# Altium PCB MCU.PcbDoc
Units mm, origin at the board's own origin, x right, y up, seen from the top; angles counter-clockwise.
Board outline 93.08 x 53.26 mm, 2 copper layers (Top Layer, Bottom Layer); 53 components, 42 nets, 223 pads, 2 vias.
Unrouted connection lines stored in the file: 56.
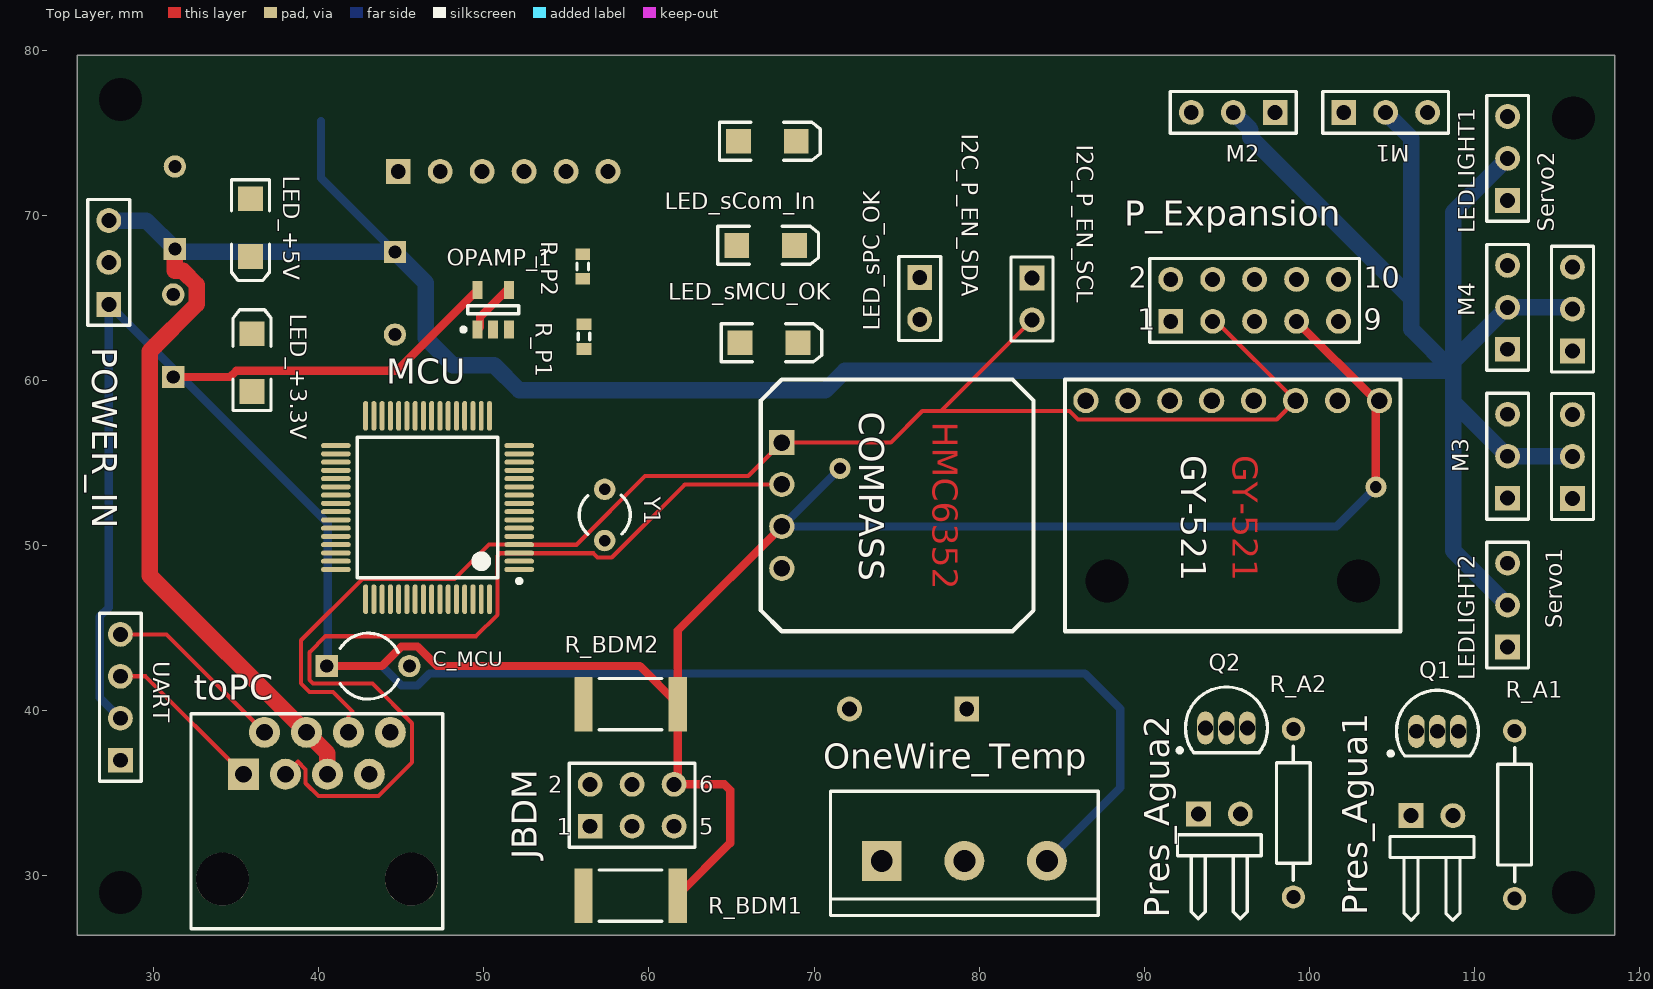
[diagram p0: Top Layer view]
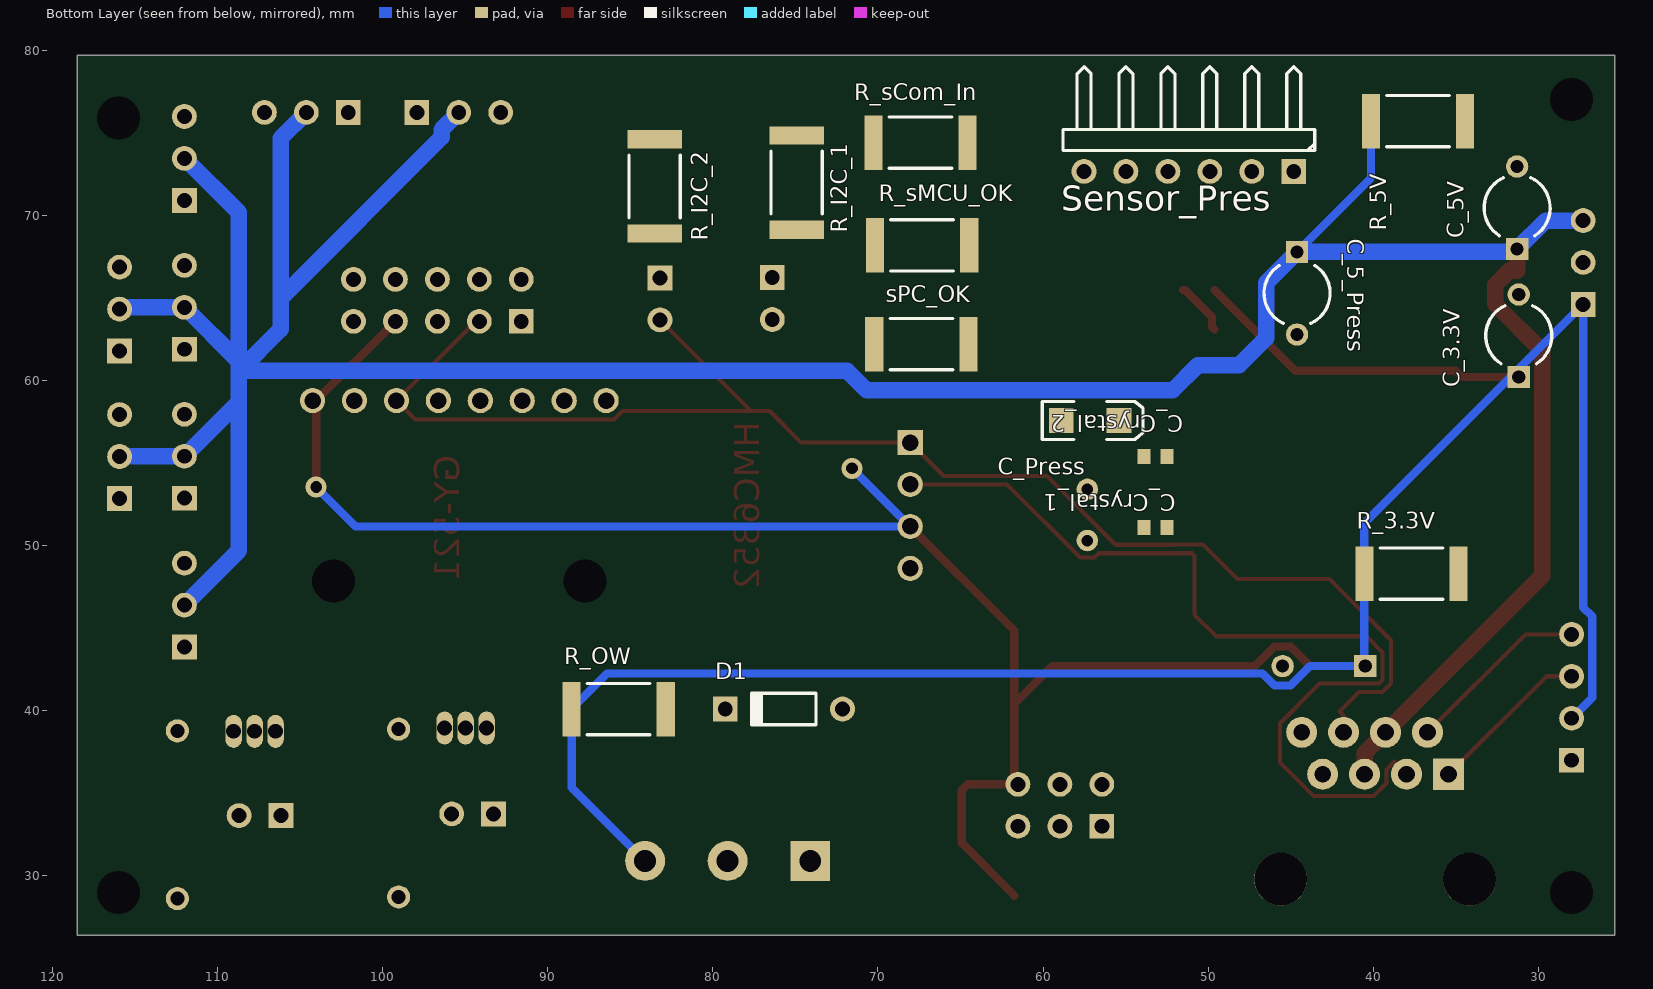
[diagram p1: Bottom Layer view, seen from below]

## Layer stack, top to bottom
Top Solder: solder mask 0.0102, Solder Resist, Dk 3.5
Top Layer: signal copper 0.0356
Dielectric 1: dielectric 0.32, FR-4, Dk 4.8
Bottom Layer: signal copper 0.0356
Bottom Solder: solder mask 0.0102, Solder Resist, Dk 3.5

## Board outline
25.4,79.675 25.4,26.416 118.475,26.416 118.475,79.675

## Design rules (kind name [scope] priority, off if disabled: settings)
Clearance Clearance_1 [InComponent('MCU')] p1: gap=0.2
Clearance [All] p2: gap=0.254
ComponentClearance ComponentClearance_1 [All] p1: gap=0.254 collisioncheckmode=3 verticalgap=0.254 showdistances=FALSE
PolygonConnect [All] p1: connectstyle=Relief reliefconductorwidth=0.254 reliefentries=4 polygonreliefangle="90 Angle" airgapwidth=0.254
RoutingVias [All] p1: holewidth=0.711 width=1.27 viastyle="Through Hole" minholewidth=0.711 minwidth=1.27 maxholewidth=0.711 maxwidth=1.27
SolderMaskExpansion [All] p1: expansion=0.102
Width [All] p1: maxlimit=1 minlimit=0.15 preferedwidth=0.254
29 further rules are at their usual default settings.

## Classes and differential pairs
component class ADC_PRES: C_5_Press C_Press OPAMP_1 R_P1 R_P2 Sensor_Pres
component class "Expansion Board": P_Expansion
component class Fuente: C_3.3V C_5V C_MCU POWER_IN
component class MCU: C_Crystal_1 C_Crystal_2 COMPASS D1 GY-521 I2C_P_EN_SCL I2C_P_EN_SDA JBDM LED_+3.3V LED_+5V LED_sCom_In LED_sMCU_OK LED_sPC_OK MCU OneWire_Temp R_3.3V R_5V R_BDM1 R_BDM2 R_I2C_1 R_I2C_2 R_OW R_sCom_In R_sMCU_OK sPC_OK toPC UART Y1
component class Presencia_Agua: Pres_Agua1 Pres_Agua2 Q1 Q2 R_A1 R_A2
component class PWM_OUTS: LEDLIGHT1 LEDLIGHT2 M1 M2 M3 M4 Servo1 Servo2

## Components (designator, comment, footprint, x,y, rotation, side; value= is the part's Value field where it differs from the comment)
C_3.3V "Cap Pol1" CAPR5-4X5 31.2,62.7 r90 bottom
C_5_Press "Cap Pol1" CAPR5-4X5 44.625,65.275 r270 bottom
C_5V "Cap Pol1" CAPR5-4X5 31.3,70.45 r90 bottom
C_Crystal_1 "Cap Semi" 1608[0603] 53.2,51.1 r0 bottom
C_Crystal_2 "Cap Semi" 1608[0603] 53.2,55.4 r0 bottom
C_MCU "Cap Pol1" CAPR5-4X5 43,42.7 r0 top
C_Press "Cap" 3.2X1.6X1.1 57.15,57.575 r180 bottom
COMPASS "HMC6352" HMC6352_SF 66.525,60.3 r270 top
D1 "Diode 1N4148" DO-35 75.7,40.1 r0 bottom
GY-521 "MPU-6050 Board GY-521" GY-521 82.65,58.775 r270 top
I2C_P_EN_SCL "Jumper_STANDARD" HDR1X2 83.2,66.2 r270 top
I2C_P_EN_SDA "Jumper_STANDARD" HDR1X2 76.4,66.225 r270 top
JBDM "Header 3X2" HDR2X3 56.445,33 r0 top
LED_+3.3V "LED" 3.2X1.6X1.1 35.975,61.075 r90 top
LED_+5V "LED" 3.2X1.6X1.1 35.875,69.25 r270 top
LED_sCom_In "LED" 3.2X1.6X1.1 67.175,74.475 r0 top
LED_sMCU_OK "LED" 3.2X1.6X1.1 67.075,68.175 r0 top
LED_sPC_OK "LED" 3.2X1.6X1.1 67.275,62.275 r0 top
LEDLIGHT1 "PWMServoTypeOut" HDR1X3 112,70.9 r90 top
LEDLIGHT2 "PWMServoTypeOut" HDR1X3 112,43.85 r90 top
M1 "PWMServoTypeOut" HDR1X3 102.075,76.225 r0 top
M2 "PWMServoTypeOut" HDR1X3 97.925,76.225 r180 top
M3 "PWMServoTypeOut" HDR1X3 112,52.867 r90 top
M4 "PWMServoTypeOut" HDR1X3 112,61.883 r90 top
MCU "MCF51QE128CLH" 840F-02_N 46.6,52.3 r180 top
OneWire_Temp "" SCREWTERMINAL-5MM-3 74.1,30.9 r0 top
OPAMP_1 "OPA345NA/250" TI-DBV5_N 50.575,64.275 r90 top
P_Expansion "Header 5X2" HDR2X5 91.6,63.575 r0 top
POWER_IN "Header 3" HDR1X3 27.3,64.6 r90 top
Pres_Agua1 "Jumper_STANDAR" HDR1X2H 106.15,33.65 r0 top
Pres_Agua2 "Jumper_STANDAR" HDR1X2H 93.275,33.75 r0 top
Q1 "PNP" TO-92A 107.75,38.75 r270 top
Q2 "PNP" TO-92A 94.975,38.95 r270 top
R_3.3V "Res" RESC6332 37.7,48.3 r0 bottom
R_5V "Res" RESC6332 37.3,75.7 r0 bottom
R_A1 "Res2" AXIAL-0.4 112.425,33.7 r270 top
R_A2 "Res2" AXIAL-0.4 99.025,33.8 r270 top
R_BDM1 "Res" RESC6332 58.9,28.8 r0 top
R_BDM2 "Res" RESC6332 58.9,40.4 r180 top
R_I2C_1 "Res3" RESC6332 74.925,71.975 r90 bottom
R_I2C_2 "Res3" RESC6332 83.525,71.75 r270 bottom
R_OW "Res" RESC6332 85.7,40.1 r0 bottom
R_P1 "Res3" J1-0603 56.075,62.65 r270 top
R_P2 "Res3" J1-0603 56,66.9 r270 top
R_sCom_In "Res" RESC6332 67.425,74.4 r0 bottom
R_sMCU_OK "Res" RESC6332 67.325,68.175 r0 bottom
Sensor_Pres "MPX5700AP" HDR1X6H 44.825,72.65 r0 bottom (schematic designator *)
Servo1 "PWMServoTypeOut" HDR1X3 115.925,52.85 r90 top
Servo2 "PWMServoTypeOut" HDR1X3 115.925,61.775 r90 top
sPC_OK "Res" RESC6332 67.375,62.2 r0 bottom
toPC "PRT-00643; BOB-00716." RJ45-8 39.9,29.8 r0 top
UART "Header 4" HDR1X4 28,37 r90 top
Y1 "32.768KHz" R38 57.325,51.85 r180 top

## Footprints (in the part's own frame and the unit in brackets; to place one, negate y for a bottom-side part, rotate by r counter-clockwise, add the part's x,y. Pads: shape width x height; smd on the part's side, far side on the other; paste and mask are expansions set on the pad)
3.2X1.6X1.1 [mm] "SMT LED; 2 Flat Leads"
  rect 1.5x1.5 smd: 1(-1.75,0) 2(1.75,0)
  silkscreen extent -2.9,-1.15 3.2,1.15
840F-02_N [mm] "Thin QFP, 64-Leads, Body 10x10mm, Pitch 0.5mm, IPC Medium Density"
  oval 1.8x0.3 smd: 1(-5.55,3.75) 2(-5.55,3.25) 3(-5.55,2.75) 4(-5.55,2.25) 5(-5.55,1.75) 6(-5.55,1.25) 7(-5.55,0.75) 8(-5.55,0.25) 9(-5.55,-0.25) 10(-5.55,-0.75) 11(-5.55,-1.25) 12(-5.55,-1.75) 13(-5.55,-2.25) 14(-5.55,-2.75) 15(-5.55,-3.25) 16(-5.55,-3.75) 33(5.55,-3.75) 34(5.55,-3.25) 35(5.55,-2.75) 36(5.55,-2.25) 37(5.55,-1.75) 38(5.55,-1.25) 39(5.55,-0.75) 40(5.55,-0.25) 41(5.55,0.25) 42(5.55,0.75) 43(5.55,1.25) 44(5.55,1.75) 45(5.55,2.25) 46(5.55,2.75) 47(5.55,3.25) 48(5.55,3.75)
  oval 0.3x1.8 smd: 17(-3.75,-5.55) 18(-3.25,-5.55) 19(-2.75,-5.55) 20(-2.25,-5.55) 21(-1.75,-5.55) 22(-1.25,-5.55) 23(-0.75,-5.55) 24(-0.25,-5.55) 25(0.25,-5.55) 26(0.75,-5.55) 27(1.25,-5.55) 28(1.75,-5.55) 29(2.25,-5.55) 30(2.75,-5.55) 31(3.25,-5.55) 32(3.75,-5.55) 49(3.75,5.55) 50(3.25,5.55) 51(2.75,5.55) 52(2.25,5.55) 53(1.75,5.55) 54(1.25,5.55) 55(0.75,5.55) 56(0.25,5.55) 57(-0.25,5.55) 58(-0.75,5.55) 59(-1.25,5.55) 60(-1.75,5.55) 61(-2.25,5.55) 62(-2.75,5.55) 63(-3.25,5.55) 64(-3.75,5.55)
  silkscreen extent -5.68,-4.25 4.25,4.57, body extent -5,-5 5,5, height 1.6
1608[0603] [mm] "Chip Capacitor, Body 1.6x0.8mm, IPC High Density"
  rect 0.8x0.9 smd: 1(-0.7,0) 2(0.7,0)
  body extent -0.87,-0.48 0.87,0.48, height 1.3
AXIAL-0.4 [mm] "Axial Device, Thru-Hole; 2 Leads; 0.4 in Pin Spacing"
  round 1.4 hole 0.85: 1(-5.08,0) 2(5.08,0)
  silkscreen extent -4.06,-1.02 4.06,1.02
CAPR5-4X5 [mm] "Capacitor; 2 Leads"
  rect 1.35x1.35 hole 0.8: 1(-2.5,0)
  round 1.35 hole 0.8: 2(2.5,0)
  silkscreen extent -1.69,-2 1.82,2
DO-35 [mm] "Diode, Axial; Body 3.8 x 1.9 mm (LxDia. max), Lead Dia. 0.53 mm (max)"
  round 1.5 hole 0.9: 1(-3.55,0)
  rect 1.5x1.5 hole 0.9: 2(3.55,0)
  silkscreen extent -1.95,-0.95 2.05,0.95
GY-521 [mil]
  round 60 hole 39.37: 1(0,850) 2(0,750) 3(0,650) 4(0,550) 5(0,450) 6(0,350) 7(0,250) 8(0,150)
  round 60 hole 102.36: SCREW1(430,800) SCREW2(430,200)
  silkscreen extent -50,100 550,900
HDR1X2 [mm] "Connector; Header; 2 Position"
  rect 1.5x1.5 hole 0.9: 1(0,0)
  round 1.5 hole 0.9: 2(2.54,0)
  silkscreen extent -1.27,-1.27 3.81,1.27
HDR1X2H [mm] "Connector; Header; 2 Position; Right Angle"
  rect 1.5x1.5 hole 0.9: 1(0,0)
  round 1.5 hole 0.9: 2(2.54,0)
  silkscreen extent -1.27,-6.35 3.81,-1.27
HDR1X3 [mm] "Connector; Header; 3 Position"
  rect 1.5x1.5 hole 0.9: 1(0,0)
  round 1.5 hole 0.9: 2(2.54,0) 3(5.08,0)
  silkscreen extent -1.27,-1.27 6.35,1.27
HDR1X4 [mm] "Connector; Header; 4 Position"
  rect 1.5x1.5 hole 0.9: 1(0,0)
  round 1.5 hole 0.9: 2(2.54,0) 3(5.08,0) 4(7.62,0)
  silkscreen extent -1.27,-1.27 8.89,1.27
HDR1X6H [mm] "Connector; Header; 6 Position; Right Angle"
  rect 1.5x1.5 hole 0.9: 1(0,0)
  round 1.5 hole 0.9: 2(2.54,0) 3(5.08,0) 4(7.62,0) 5(10.16,0) 6(12.7,0)
  silkscreen extent -1.27,-6.35 13.97,-1.27
HDR2X3 [mm] "Connector; Header; 3x2 Position"
  rect 1.5x1.5 hole 0.9: 1(0,0)
  round 1.5 hole 0.9: 2(0,2.54) 3(2.54,0) 4(2.54,2.54) 5(5.08,0) 6(5.08,2.54)
  silkscreen extent -1.27,-1.27 6.35,3.81
HDR2X5 [mm] "Connector; Header; 5x2 Position"
  rect 1.5x1.5 hole 0.9: 1(0,0)
  round 1.5 hole 0.9: 2(0,2.54) 3(2.54,0) 4(2.54,2.54) 5(5.08,0) 6(5.08,2.54) 7(7.62,0) 8(7.62,2.54) 9(10.16,0) 10(10.16,2.54)
  silkscreen extent -1.27,-1.27 11.43,3.81
HMC6352_SF [mil]
  rect 60x60 hole 39.37: 1(160,60)
  round 60 hole 39.37: 2(260,60) 3(360,60) 4(460,60)
  silkscreen extent 10,10 610,660
J1-0603 [mm] "Chip Resistor, Body 1.6x0.8mm, IPC High Density"
  rect 0.7x0.9 smd: 1(-0.75,0) 2(0.75,0)
  silkscreen extent -0.2,-0.35 0.2,0.35, body extent -0.85,-0.48 0.85,0.48, height 0.9
R38 [mm] "Crystal, Thru-Hole; 2 Leads; Body 3.1 x 8.2 mm (Dia.xH)"
  round 1.3 hole 0.7: 1(0,1.55) 2(0,-1.55)
  silkscreen extent -1.55,-1.19 1.55,1.17
RESC6332 [mm] "Chip Resistor, Body 6.3x3.2mm, IPC High Density"
  rect 1.1x3.3 smd: 1(-2.85,0) 2(2.85,0)
  silkscreen extent -1.9,-1.55 1.9,1.55, body extent -3.22,-1.68 3.22,1.68, height 0.9
RJ45-8 [mil]
  round 126 hole 126: 1(-225,0) 1(225,0)
  rect 74x74 hole 40: 1(-175,250)
  round 74 hole 40: 2(-125,350) 3(-75,250) 4(-25,350) 5(25,250) 6(75,350) 7(125,250) 8(175,350)
  silkscreen extent -300,-118 300,394
SCREWTERMINAL-5MM-3 [mil]
  rect 95x95 hole 52: 1(0,0)
  round 95 hole 52: 2(197,0) 3(394,0)
  silkscreen extent -122,-130 516,166
TI-DBV5_N [mm] "SOT23, 5-Leads, Body 2.9x1.6mm, Pitch 0.95mm, IPC Medium Density"
  rect 1.1x0.6 smd: 1(-1.2,0.95) 2(-1.2,0) 3(-1.2,-0.95) 4(1.2,-0.95) 5(1.2,0.95)
  silkscreen extent -1.32,-1.55 0.25,1.92, body extent -0.87,-1.52 0.87,1.53, height 1.45
TO-92A [mm] "TO, Flat Index; 3 In-Line, Axial Leads; Body Dia. 4.5mm; Leads 0.51 x 0.48 mm (max)"
  oval 2x1 hole 0.9: 1(0,-1.27) 2(0,0) 3(0,1.27)
  silkscreen extent -2.48,-2.95 1.5,2.48, body extent -2.5,-2.5 1.5,2.5, height 6.86

## Part data
C_3.3V C_5_Press C_5V C_MCU: "Polarized Capacitor (Radial)"
C_Crystal_1 C_Crystal_2: "Capacitor (Semiconductor SIM Model)"
C_Press: "Capacitor"
D1: "High Conductance Fast Diode"
GY-521: library part GY-521
I2C_P_EN_SCL I2C_P_EN_SDA: library part Jumper_STANDAR
JBDM: "Header, 3-Pin, Dual row"
LED_+3.3V LED_+5V LED_sCom_In LED_sMCU_OK LED_sPC_OK: library part LED2, "Typical RED, GREEN, YELLOW, AMBER GaAs LED"
MCU: "MCF51QE128 ColdFire V1 Microcontroller, 32-Bit, 128KB Flash, 8KB RAM, -40°C to 85°C, 64-Pin LQFP"
OneWire_Temp: library part M03-SCREW-5MM
OPAMP_1: "Low Power, Single-Supply, Rail-to-Rail Operational Amplifier MicroAmplifier(TM) Series, 2.7 to 5.5 V, -55 to 125 degC, 5-pin SOT23 (DBV5), Green (RoHS & no Sb/Br)"
P_Expansion: "Header, 5-Pin, Dual row"
POWER_IN: "Header, 3-Pin"
Q1 Q2: "PNP Bipolar Transistor"
R_3.3V R_5V R_BDM1 R_BDM2 R_OW R_sCom_In R_sMCU_OK sPC_OK: library part Res3, "Resistor"
R_A1 R_A2 R_I2C_1 R_I2C_2 R_P1 R_P2: "Resistor"
toPC: library part RJ45-8PTH
UART: "Header, 4-Pin"
Y1: library part XTAL, "Crystal Oscillator"

## Free pads (board coordinates)
  round 1.524 hole 2.6: 0(116,75.875) 1(116,29) 2(28,29) 3(28,77)

## Via types
v1: diameter 1.27, hole 0.711, Top Layer to Bottom Layer, 2 vias

## Nets (pads, with @x,y where several pads share a name; then routed paths per layer and width w, separated by ;. In a path a pad name is that pad's centre, name@x,y a point inside that pad or via, vN(x,y) a via of type N, cw(c..) or ccw(c..) an arc to the next point about the centre after c; other vN are vias at no path point)
+3.3V: C_3.3V.1 C_MCU.1 COMPASS.3 GY-521.1 JBDM.6 OneWire_Temp.3 OPAMP_1.5 P_Expansion.7 POWER_IN.1 R_3.3V.2 R_A1.2 R_A2.2 R_BDM1.2 R_BDM2.1 R_I2C_1.2 R_I2C_2.2 R_OW.2 UART.2 | length 241.2
  Top Layer w0.5: C_3.3V.1 34.637,60.2 35.016,60.579 44.729,60.579 OPAMP_1.5 ; C_MCU.1 43.833,42.7 45.012,43.879 45.988,43.879 47.167,42.7 59.45,42.7 R_BDM2.1 ; R_BDM1.2 64.925,31.975 64.925,35.2 64.585,35.54 JBDM.6 61.75,35.765 R_BDM2.1 ; COMPASS.3 61.75,44.857 R_BDM2.1 ; P_Expansion.7 104.02,58.775 v1(104.02,53.545)
  Bottom Layer w0.5: UART.2 26.746,40.794 26.746,45.693 27.3,46.247 POWER_IN.1 40.55,51.35 R_3.3V.2 C_MCU.1@40.55,42.75 ; C_MCU.1 43.833,42.7 45.012,41.521 45.988,41.521 46.721,42.254 86.396,42.254 R_OW.2 88.55,35.342 OneWire_Temp.3 ; v1(71.568,54.675) COMPASS.3 101.631,51.156 v1(104.02,53.545)
+5V: C_5_Press.1 C_5V.1 LEDLIGHT1.2 LEDLIGHT2.2 M1.2 M2.2 M3.2 M4.2 P_Expansion.5 POWER_IN.3 R_5V.2 Servo1.2 Servo2.2 toPC.4 toPC.5 | length 216.1
  Top Layer w1: C_5V.1 31.3,66.629 31.792,66.629 32.629,65.792 32.629,64.608 29.771,61.75 29.771,48.184 toPC.4 40.535,37.42 toPC.5
  Bottom Layer w0.5: R_5V.2 40.15,72.25 C_5_Press.1
  Bottom Layer w1: POWER_IN.3 29.57,69.68 C_5V.1 31.475,67.775 C_5_Press.1 46.5,65.9 46.5,62.55 48.125,60.925 50.625,60.925 52.15,59.4 70.691,59.4 71.866,60.575 108.7,60.575 ; M2.2 96.421,75.189 96.421,74.721 106.175,64.967 ; M1.2 106.175,74.665 106.175,64.967 ; LEDLIGHT2.2 108.7,49.69 108.7,58.707 ; LEDLIGHT1.2 111.974,73.44 108.7,70.166 108.7,61.15 ; Servo2.2@115.817,64.423 M4.2 111.974,64.423 108.7,61.15 ; Servo1.2@115.908,55.407 M3.2 108.7,58.707 ; 106.175,64.967 106.175,63.1 108.7,60.575 ; 108.7,58.707 108.7,60.575 ; 108.7,60.575 108.7,61.15
AD1: MCU.42 P_Expansion.2
AD2: MCU.36 P_Expansion.4
AD3: MCU.35 P_Expansion.6
AD4: MCU.30 P_Expansion.8
ADC_PRESSURE_3.3V: MCU.43 OPAMP_1.1 OPAMP_1.4 | length 3.3
  Top Layer w0.5: OPAMP_1.1 49.771,63.221 49.771,63.834 51.412,65.475 OPAMP_1.4
BKGD: JBDM.1 MCU.64 R_BDM1.1
GND: C_3.3V.2 C_5_Press.2 C_5V.2 C_Crystal_1.1 C_Crystal_2.1 C_MCU.2 C_Press.1 COMPASS.4 GY-521.2 JBDM.2 LED_+3.3V.2 LED_+5V.2 LED_sCom_In.2 LED_sMCU_OK.2 LED_sPC_OK.2 LEDLIGHT1.1 LEDLIGHT2.1 M1.1 M2.1 M3.1 M4.1 OneWire_Temp.1 OPAMP_1.2 P_Expansion.9 P_Expansion.10 POWER_IN.2 Pres_Agua1.1 Pres_Agua2.1 Q1.1 Q2.1 R_P2.1 Servo1.1 Servo2.1 toPC.7 toPC.8 UART.1
LEDLIGHT1: LEDLIGHT1.3 MCU.26
LEDLIGHT2: LEDLIGHT2.3 MCU.25
M1_ESC: M1.3 MCU.50
M2_ESC: M2.3 MCU.18
M3_ESC: M3.3 MCU.38
M4_ESC: M4.3 MCU.49
NetC_Crystal_1_2: C_Crystal_1.2 MCU.13 Y1.2
NetC_Crystal_2_2: C_Crystal_2.2 MCU.12 Y1.1
NetI2C_P_EN_SCL_1: I2C_P_EN_SCL.1 R_I2C_2.1
NetI2C_P_EN_SDA_1: I2C_P_EN_SDA.1 R_I2C_1.1
NetLED_+3.3V_1: LED_+3.3V.1 R_3.3V.1
NetLED_+5V_1: LED_+5V.1 R_5V.1
NetLED_sCom_In_1: LED_sCom_In.1 R_sCom_In.1
NetLED_sMCU_OK_1: LED_sMCU_OK.1 R_sMCU_OK.1
NetLED_sPC_OK_1: LED_sPC_OK.1 sPC_OK.1
NetOPAMP_1_3: OPAMP_1.3 R_P1.1 R_P2.2
NetPres_Agua1_2: Pres_Agua1.2 Q1.2
NetPres_Agua2_2: Pres_Agua2.2 Q2.2
P_OUT: C_Press.2 R_P1.2
PRESENCIAAGUA1: MCU.58 Q1.3 R_A1.1
PRESENCIAAGUA2: MCU.57 Q2.3 R_A2.1
RESET: JBDM.4 MCU.63 R_BDM2.2
RXSERIALCOM: MCU.34 toPC.1 UART.3 | length 9.9
  Top Layer w0.254: UART.3 29.525,42.08 toPC.1@35.455,36.15
RXSERIALCOM2: D1.1 MCU.52 OneWire_Temp.2 R_OW.1
S_PANCAMERA: MCU.19 Servo2.3
S_TILTCAMERA: MCU.37 Servo1.3
SCL: COMPASS.1 GY-521.3 I2C_P_EN_SCL.2 MCU.4 P_Expansion.3 toPC.6 | length 89.3
  Top Layer w0.254: toPC.6 41.805,39.713 42.048,39.956 40.868,41.136 39.457,41.136 38.936,41.657 38.936,44.261 42.652,47.977 48.238,47.977 50.319,50.058 MCU.4@52.15,50.058 ; MCU.4 55.617,50.05 59.771,54.204 66.017,54.204 COMPASS.1 74.653,56.236 76.558,58.141 77.681,58.141 ; I2C_P_EN_SCL.2 77.681,58.141 ; P_Expansion.3 94.36,63.575 GY-521.3 98.017,57.632 85.987,57.632 85.478,58.141 77.681,58.141
SCOM_IN: MCU.16 R_sCom_In.2
SDA: COMPASS.2 GY-521.4 I2C_P_EN_SDA.2 MCU.3 P_Expansion.1 toPC.3 | length 56.6
  Top Layer w0.254: toPC.3 38.749,36.904 39.214,36.439 39.214,35.603 39.988,34.829 43.622,34.829 45.666,36.873 45.666,39.237 43.259,41.644 39.667,41.644 39.444,41.867 39.444,43.533 40.421,44.51 49.535,44.51 50.827,45.802 50.827,49.369 50.985,49.527 56.64,49.527 56.898,49.269 57.752,49.269 62.179,53.696 COMPASS.2
SMCU_OK: MCU.21 R_sMCU_OK.2
SPC_OK: MCU.62 sPC_OK.2
TXSERIALCOM: MCU.33 toPC.2 UART.4 | length 11.2
  Top Layer w0.254: UART.4 30.795,44.62 toPC.2
TXSERIALCOM2: D1.2 MCU.51
pads on no net: GY-521.5 GY-521.6 GY-521.7 GY-521.8 GY-521.SCREW1 GY-521.SCREW2 JBDM.3 JBDM.5 MCU.1 MCU.2 MCU.5 MCU.6 MCU.7 MCU.8 MCU.9 MCU.10 MCU.11 MCU.14 MCU.15 MCU.17 MCU.20 MCU.22 MCU.23 MCU.24 MCU.27 MCU.28 MCU.29 MCU.31 MCU.32 MCU.39 MCU.40 MCU.41 MCU.44 MCU.45 MCU.46 MCU.47 MCU.48 MCU.53 MCU.54 MCU.55 MCU.56 MCU.59 MCU.60 MCU.61 Sensor_Pres.1 Sensor_Pres.2 Sensor_Pres.3 Sensor_Pres.4 Sensor_Pres.5 Sensor_Pres.6

## Dimensions
118.475,79.675 to 118.475,26.416 on Multi-Layer
118.475,79.675 to 25.4,79.675 on Multi-Layer

## Text inside footprints (layer, text, board x,y; h text height)
JBDM: Top Overlay "1" at 54.413,32.492 h1; Top Overlay "2" at 53.905,35.032 h1; Top Overlay "5" at 63.049,32.492 h1; Top Overlay "6" at 63.049,35.032 h1
OneWire_Temp: Mechanical 2 ">NAME" at 72.83,33.44 h1; Mechanical 4 ">VALUE" at 72.83,32.17 h1
P_Expansion: Top Overlay "2" at 89.06,65.607 h1.27; Top Overlay "1" at 89.568,63.067 h1.27; Top Overlay "9" at 103.284,63.067 h1.27; Top Overlay "10" at 103.284,65.607 h1.27